# Altium PCB PCB_MAINCUTTIN.PcbDoc
Units mil, origin at the board's own origin, x right, y up, seen from the top; angles counter-clockwise.
Board outline 6000 x 4000 mil, 2 copper layers (Top Layer, Bottom Layer); 146 components, 183 nets, 547 pads, 0 vias.
Unrouted connection lines stored in the file: 344.
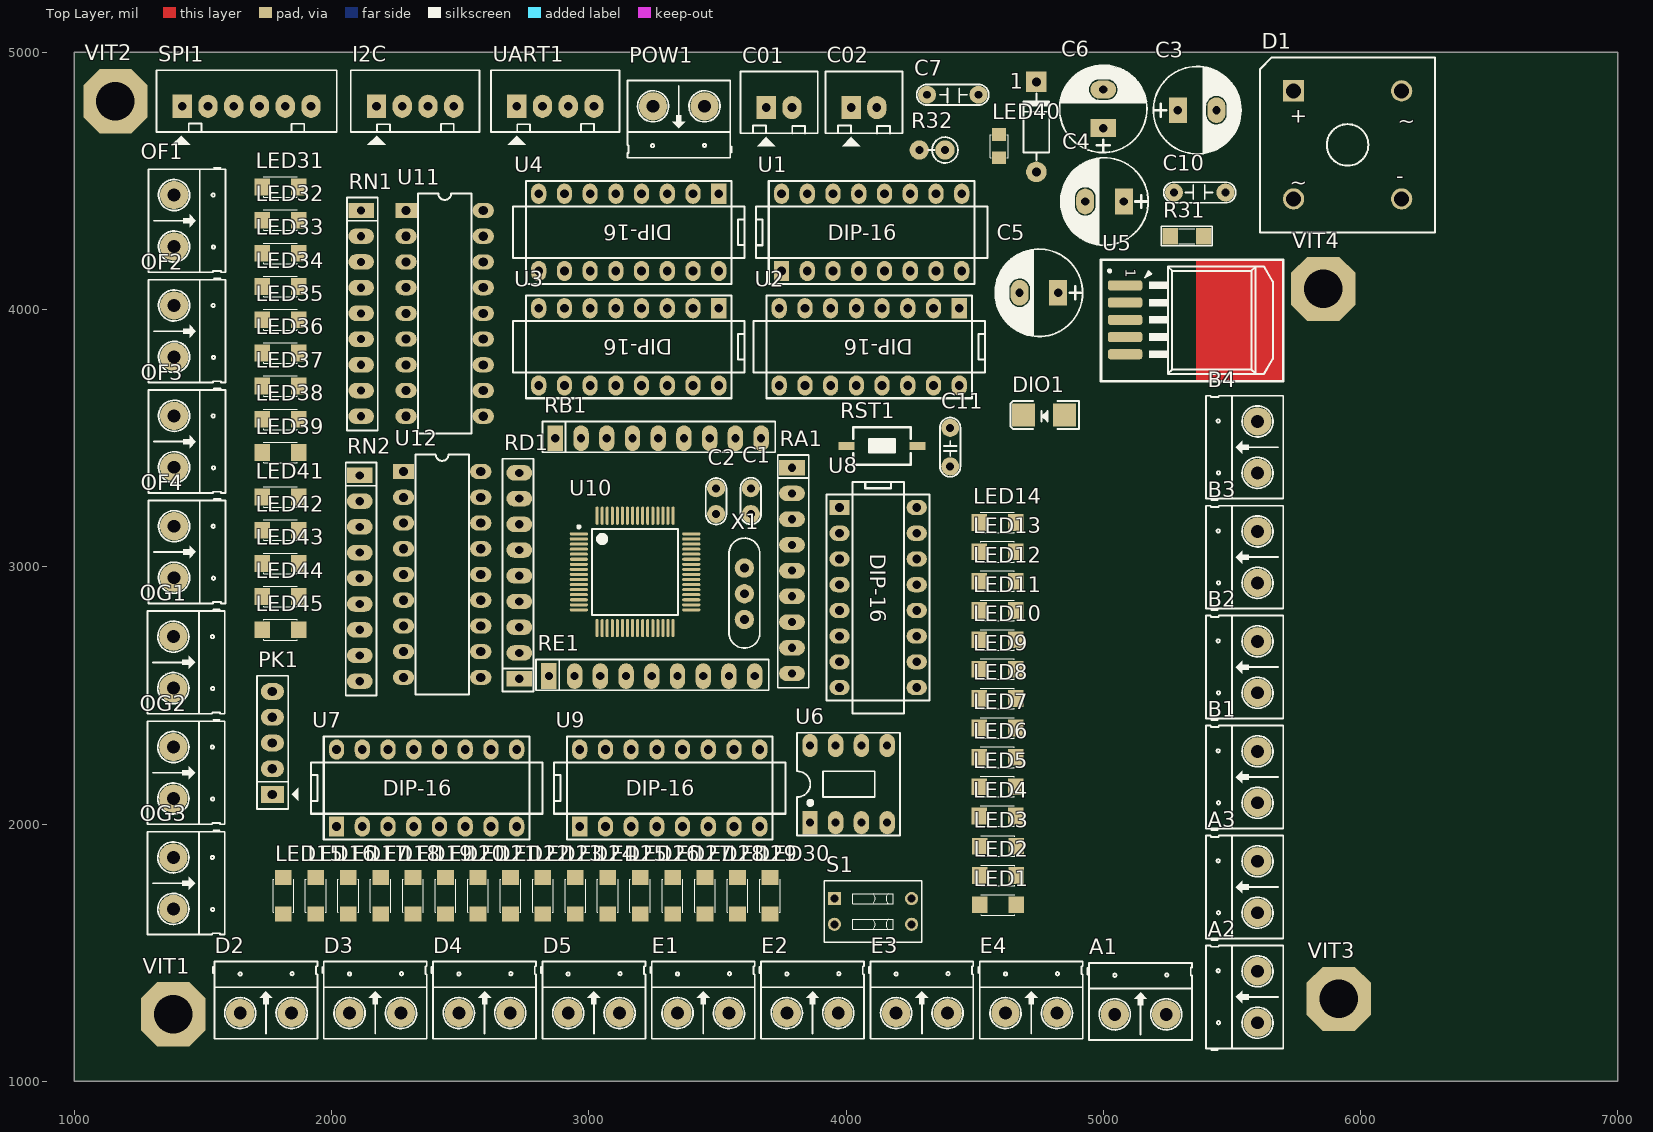
[diagram p0: Top Layer view]
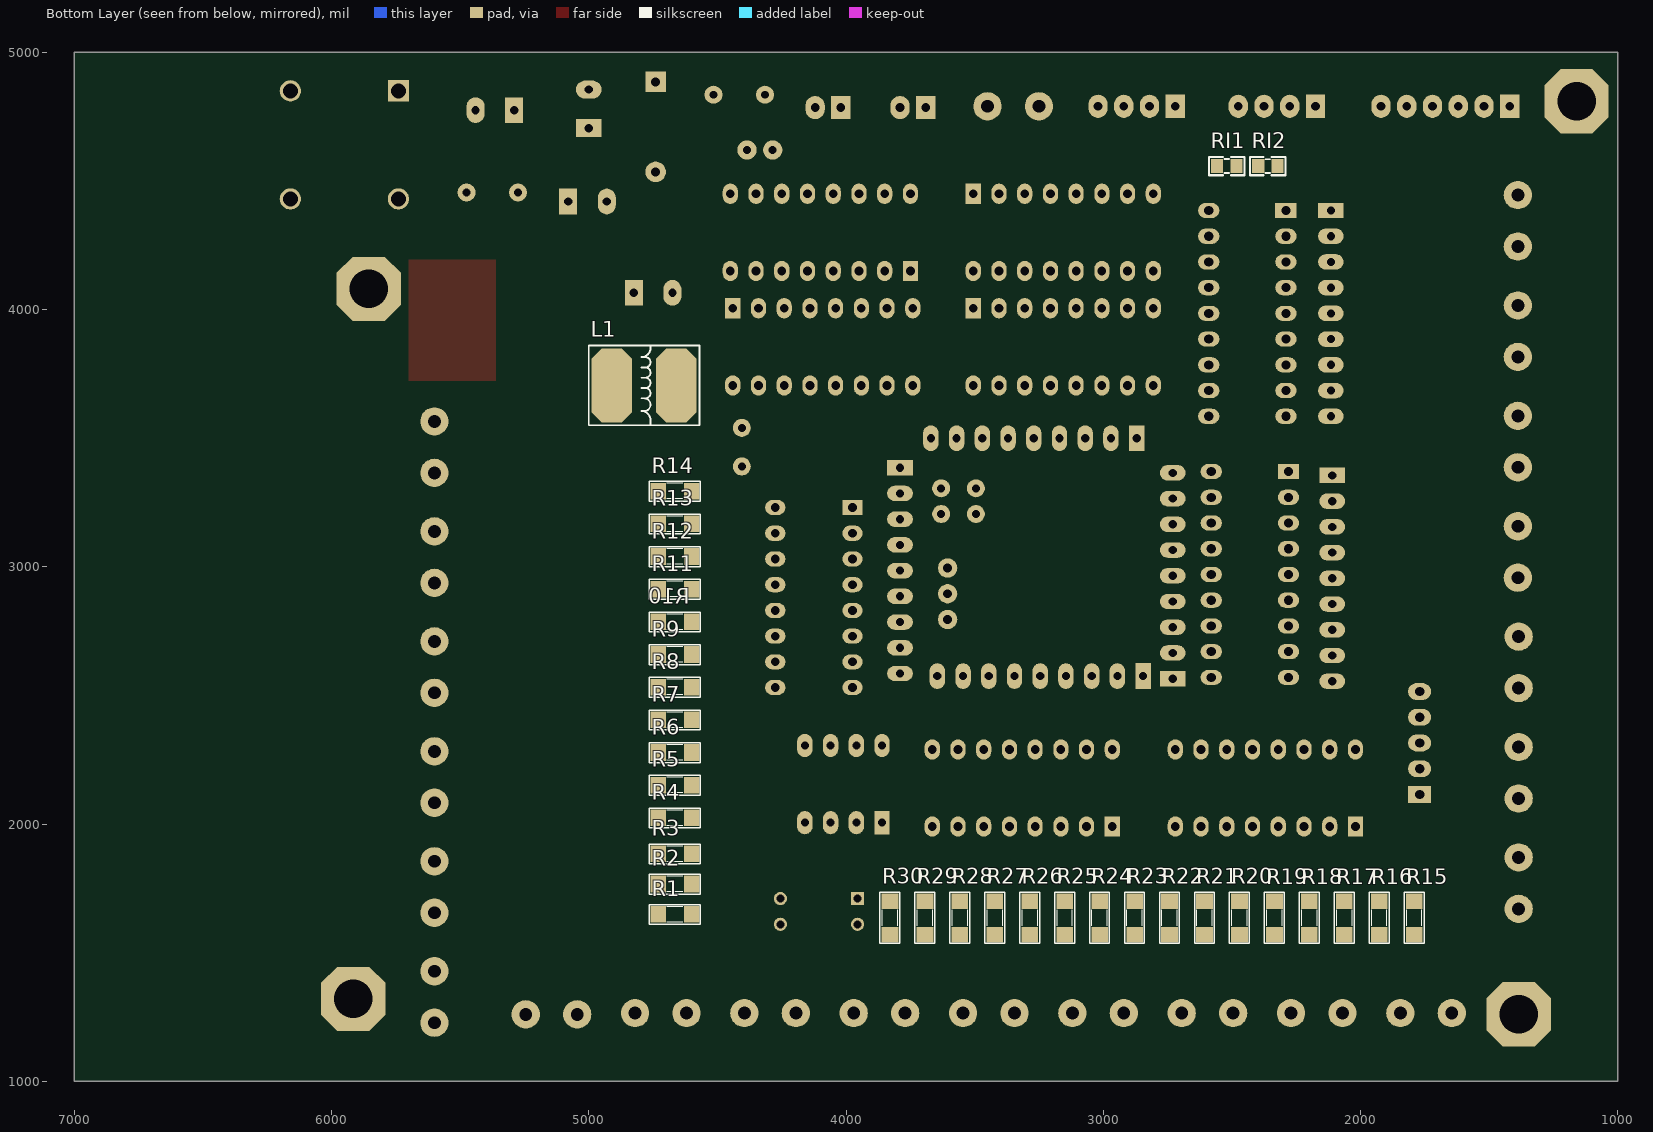
[diagram p1: Bottom Layer view, seen from below]

## Layer stack, top to bottom
Top Solder: solder mask 0.4, Solder Resist, Dk 3.5
Top Layer: signal copper 1.4
Dielectric 1: dielectric 12.6, FR-4, Dk 4.8
Bottom Layer: signal copper 1.4
Bottom Solder: solder mask 0.4, Solder Resist, Dk 3.5

## Board outline
1000,1000 7000,1000 7000,5000 1000,5000

## Design rules (kind name [scope] priority, off if disabled: settings)
Clearance [All] p1: gap=10
PolygonConnect [All] p1: connectstyle=Relief reliefconductorwidth=10 reliefentries=4 polygonreliefangle="90 Angle" airgapwidth=10
RoomDefinition MAINCUTTING [InComponentClass('MAINCUTTING')] p1: confinementstyle=ConfineIn formatcopy=TRUE lockcomponents=FALSE outline 7090,1383 54740,1383 54740,3483 7090,3483
RoutingVias [All] p1: holewidth=28 width=50 viastyle="Through Hole" minholewidth=28 minwidth=50 maxholewidth=28 maxwidth=50
SolderMaskExpansion [All] p1: expansion=4
Width [All] p1: maxlimit=10 minlimit=10 preferedwidth=10
30 further rules are at their usual default settings.

## Components (designator, comment, footprint, x,y, rotation, side; value= is the part's Value field where it differs from the comment)
1 "D0" D1A 4740,4535 r270 top
A1 "Header 2_1" HED2 5045,1260 r0 top
A2 "Header 2_1" HED2 5600,1227.5 r90 top
A3 "Header 2_1" HED2 5600,1655 r90 top
B1 "Header 2_1" HED2 5600,2082.5 r90 top
B2 "Header 2_1" HED2 5600,2510 r90 top
B3 "Header 2_1" HED2 5600,2937.5 r90 top
B4 "Header 2_1" HED2 5600,3365 r90 top
C01 "JP1" CON2 3690,4785 r0 top
C1 "22pF" CN1 3630,3205 r90 top
C02 "JP2" CON2 4020,4785 r0 top
C2 "22pF" CN1 3495,3305 r270 top
C3 "100uF/35V" CP1.5/3.4 5290,4775 r0 top
C4 "1000uF/16V" CP1.5/3.4 5080,4420 r180 top
C5 "100uF/16V" CP1.5/3.4 4825,4065 r180 top
C6 "100nF/16V" CP1.5/3.4 5000,4705 r90 top
C7 "104" CN2 4515,4835 r180 top
C10 "104" CN2 5275,4455 r0 top
C11 "103" CN1.5 4405,3390 r90 top
D1 "Bridge2" D-46_6A 5950,4640 r0 top
D2 "Header 2_1" HED2 1645,1265 r0 top
D3 "Header 2_1" HED2 2070,1265 r0 top
D4 "Header 2_1" HED2 2495,1265 r0 top
D5 "Header 2_1" HED2 2920,1265 r0 top
DIO1 "Diode SMD" DIO-SMD-106 4770,3590 r0 top
E1 "Header 2_1" HED2 3345,1265 r0 top
E2 "Header 2_1" HED2 3770,1265 r0 top
E3 "Header 2_1" HED2 4195,1265 r0 top
E4 "Header 2_1" HED2 4620,1265 r0 top
I2C "JP4" CON4 2175,4790 r0 top
L1 "100uH - 3A SMD" "Cuon Cam 7.5x7x5" 4635,3705 r90 bottom
LED1 "LED SMD" SM-LED-1206-Blue 4662,1685.59 r180 top
LED2 "LED SMD" SM-LED-1206-Blue 4662,1799.71 r180 top
LED3 "LED SMD" SM-LED-1206-Blue 4662,1913.82 r180 top
LED4 "LED SMD" SM-LED-1206-Blue 4660,2031.18 r180 top
LED5 "LED SMD" SM-LED-1206-Blue 4660,2145.29 r180 top
LED6 "LED SMD" SM-LED-1206-Blue 4660,2259.41 r180 top
LED7 "LED SMD" SM-LED-1206-Blue 4660,2373.53 r180 top
LED8 "LED SMD" SM-LED-1206-Blue 4660,2487.65 r180 top
LED9 "LED SMD" SM-LED-1206-Blue 4660,2601.76 r180 top
LED10 "LED SMD" SM-LED-1206-Blue 4660,2715.88 r180 top
LED11 "LED SMD" SM-LED-1206-Blue 4660,2830 r180 top
LED12 "LED SMD" SM-LED-1206-Blue 4660,2944.12 r180 top
LED13 "LED SMD" SM-LED-1206-Blue 4660,3058.24 r180 top
LED14 "LED SMD" SM-LED-1206-Blue 4660,3172.35 r180 top
LED15 "LED SMD" SM-LED-1206-Blue 1812.65,1650 r90 top
LED16 "LED SMD" SM-LED-1206-Blue 1938.76,1650 r90 top
LED17 "LED SMD" SM-LED-1206-Blue 2064.88,1650 r90 top
LED18 "LED SMD" SM-LED-1206-Blue 2191,1650 r90 top
LED19 "LED SMD" SM-LED-1206-Blue 2317.12,1650 r90 top
LED20 "LED SMD" SM-LED-1206-Blue 2443.24,1650 r90 top
LED21 "LED SMD" SM-LED-1206-Blue 2569.36,1650 r90 top
LED22 "LED SMD" SM-LED-1206-Blue 2695.48,1650 r90 top
LED23 "LED SMD" SM-LED-1206-Blue 2821.59,1650 r90 top
LED24 "LED SMD" SM-LED-1206-Blue 2947.71,1650 r90 top
LED25 "LED SMD" SM-LED-1206-Blue 3073.83,1650 r90 top
LED26 "LED SMD" SM-LED-1206-Blue 3199.95,1650 r90 top
LED27 "LED SMD" SM-LED-1206-Blue 3326.07,1650 r90 top
LED28 "LED SMD" SM-LED-1206-Blue 3452.19,1650 r90 top
LED29 "LED SMD" SM-LED-1206-Blue 3578.3,1650 r90 top
LED30 "LED SMD" SM-LED-1206-Blue 3704.42,1650 r90 top
LED31 "LED SMD" SM-LED-1206-Blue 1730,4476.54 r0 top
LED32 "LED SMD" SM-LED-1206-Blue 1730,4347.5 r0 top
LED33 "LED SMD" SM-LED-1206-Blue 1730,4218.46 r0 top
LED34 "LED SMD" SM-LED-1206-Blue 1730,4089.42 r0 top
LED35 "LED SMD" SM-LED-1206-Blue 1730,3960.39 r0 top
LED36 "LED SMD" SM-LED-1206-Blue 1730,3831.35 r0 top
LED37 "LED SMD" SM-LED-1206-Blue 1730,3702.31 r0 top
LED38 "LED SMD" SM-LED-1206-Blue 1730,3573.27 r0 top
LED39 "LED SMD" SM-LED-1206-Blue 1730,3444.23 r0 top
LED40 "LED SMD" SM-LED-0805-Blue 4595,4590 r90 top
LED41 "LED SMD" SM-LED-1206-Blue 1730,3271.16 r0 top
LED42 "LED SMD" SM-LED-1206-Blue 1730,3142.12 r0 top
LED43 "LED SMD" SM-LED-1206-Blue 1730,3013.08 r0 top
LED44 "LED SMD" SM-LED-1206-Blue 1730,2884.04 r0 top
LED45 "LED SMD" SM-LED-1206-Blue 1730,2755 r0 top
OF1 "Header 2_1" HED2 1388,4445 r270 top
OF2 "Header 2_1" HED2 1388,4015.83 r270 top
OF3 "Header 2_1" HED2 1388,3586.67 r270 top
OF4 "Header 2_1" HED2 1388,3157.5 r270 top
OG1 "Header 2_1" HED2 1385,2728.33 r270 top
OG2 "Header 2_1" HED2 1385,2299.17 r270 top
OG3 "Header 2_1" HED2 1385,1870 r270 top
PK1 "JP5" JP5 1770,2115 r90 top
POW1 "Header 2_1" HED2 3450,4790 r180 top
R1 "3K3" SM-RES-1206 4600,1648.82 r0 bottom
R2 "3K3" SM-RES-1206 4600,1766.32 r0 bottom
R3 "3K3" SM-RES-1206 4600,1883.82 r0 bottom
R4 "3K3" SM-RES-1206 4600,2023.82 r0 bottom
R5 "3K3" SM-RES-1206 4600,2150.82 r0 bottom
R6 "3K3" SM-RES-1206 4600,2277.82 r0 bottom
R7 "3K3" SM-RES-1206 4600,2404.82 r0 bottom
R8 "3K3" SM-RES-1206 4600,2531.82 r0 bottom
R9 "3K3" SM-RES-1206 4600,2658.82 r0 bottom
R10 "3K3" SM-RES-1206 4600,2785.82 r0 bottom
R11 "3K3" SM-RES-1206 4600,2912.82 r0 bottom
R12 "3K3" SM-RES-1206 4600,3039.82 r0 bottom
R13 "3K3" SM-RES-1206 4600,3166.82 r0 bottom
R14 "3K3" SM-RES-1206 4600,3293.82 r0 bottom
R15 "3K3" SM-RES-1206 1791,1570 r90 bottom
R16 "3K3" SM-RES-1206 1926.87,1570 r90 bottom
R17 "3K3" SM-RES-1206 2062.73,1570 r90 bottom
R18 "3K3" SM-RES-1206 2198.6,1570 r90 bottom
R19 "3K3" SM-RES-1206 2334.47,1570 r90 bottom
R20 "3K3" SM-RES-1206 2470.33,1570 r90 bottom
R21 "3K3" SM-RES-1206 2606.2,1570 r90 bottom
R22 "3K3" SM-RES-1206 2742.06,1570 r90 bottom
R23 "3K3" SM-RES-1206 2877.93,1570 r90 bottom
R24 "3K3" SM-RES-1206 3013.8,1570 r90 bottom
R25 "3K3" SM-RES-1206 3149.66,1570 r90 bottom
R26 "3K3" SM-RES-1206 3285.53,1570 r90 bottom
R27 "3K3" SM-RES-1206 3421.4,1570 r90 bottom
R28 "3K3" SM-RES-1206 3557.26,1570 r90 bottom
R29 "3K3" SM-RES-1206 3693.13,1570 r90 bottom
R30 "3K3" SM-RES-1206 3829,1570 r90 bottom
R31 "330" SM-RES-1206 5260,4285 r0 top
R32 "Res1" R1/4W1 4385,4620 r180 top
RA1 "10K" RN8 3790,3385 r270 top
RB1 "10K" RN8 2870,3500 r0 top
RD1 "10K" RN8 2730,2565 r90 top
RE1 "10K" RN8 2845,2575 r0 top
RI1 "10k" "tro smd 0805" 2520,4560 r180 bottom
RI2 "10k" "tro smd 0805" 2360,4555 r0 bottom
RN1 "4.7K" RN8 2115,4385 r270 top
RN2 "4.7K" RN8 2110,3355 r270 top
RST1 "MH001036" SW-SMD 4140,3470 r0 top
S1 "partNo" SW-DIP2 4105,1660 r270 top
SPI1 "JP6" CON6 1420,4790 r0 top
U1 "TLP521-4" DIP16 4100,4300 r0 top
U2 "TLP521-4" DIP16 4090,3855 r180 top
U3 "TLP521-4" DIP16 3155,3855 r180 top
U4 "TLP521-4" DIP16 3155,4300 r180 top
U5 "LM2576" TO263 5320,3975 r270 top
U6 "TLP521" DIP8 4005,2155 r0 top
U7 "TLP521-4" DIP16 2370,2140 r0 top
U8 "TLP521-4" DIP16 4125,2880 r270 top
U9 "TLP521-4" DIP16 3315,2140 r0 top
U10 "PIC18F6520-I/PT" TQFP-PT64_N 3180,2980 r0 top
U11 "ULN2803A" DIP18 2440,3985 r270 top
U12 "ULN2803A" DIP18 2430,2970 r270 top
UART1 "JP4" CON4 2720,4790 r0 top
VIT1 "1" VIT 1385,1260 r0 top
VIT2 "1" VIT 1160,4810 r0 top
VIT3 "1" VIT 5915,1320 r0 top
VIT4 "1" VIT 5855,4080 r0 top
X1 "20Mhz" XT3 3605,2895 r270 top

## Footprints (in the part's own frame and the unit in brackets; to place one, negate y for a bottom-side part, rotate by r counter-clockwise, add the part's x,y. Pads: shape width x height; smd on the part's side, far side on the other; paste and mask are expansions set on the pad)
CN1 [mil]
  round 70 hole 31: 1(0,0) 2(100,0)
  silkscreen extent -40,-40 141,40, body extent -60,-30 170,37, height 265
CN1.5 [mil]
  round 70 hole 31: 1(0,0) 2(150,0)
  silkscreen extent -40,-40 190,40, body extent -40,-33 190,33, height 235
CN2 [mil]
  round 70 hole 31: 1(0,0) 2(200,0)
  silkscreen extent -40,-40 240,40, body extent -54,-44 260,55, height 407
CON2 [mil] "CON2"
  rect 75x90 hole 34: 1(0,0)
  oval 75x90 hole 34: 2(100,0)
  silkscreen extent -100,-150 200,140, body extent -68,-70 168,107, height 236
CON4 [mil] "CON4"
  rect 75x90 hole 34: 1(0,0)
  oval 75x90 hole 34: 2(100,0) 3(200,0) 4(300,0)
  silkscreen extent -100,-150 400,140, body extent -90,-90 398,136, height 276
CON6 [mil] "CON6"
  rect 75x90 hole 34: 1(0,0)
  oval 75x90 hole 34: 2(100,0) 3(200,0) 4(300,0) 5(400,0) 6(500,0)
  silkscreen extent -100,-150 600,140
CP1.5/3.4 [mil] "Tu hoa 220->470uF,16V, 470uF/16V,25V"
  rect 70x100 hole 32: 1(0,0)
  oval 70x100 hole 32: 2(150,0)
  silkscreen extent -95,-170 245,170, body extent -85,-157 230,157, height 446
"Cuon Cam 7.5x7x5" [mm]
  oct 7.3x4 smd: 1(0,0.635) 2(0,6.985)
  silkscreen extent -3.94,-1.65 3.94,9.27, body extent -3.5,0.07 3.5,7.8, height 5.02
D1A [mil] "Diode 1A, W 100mil, L 350mil"
  round 80 hole 35: 1(0,0)
  rect 80x80 hole 35: 2(-350,0)
  silkscreen extent -305,-50 -45,50, body extent -386,-33 34,36, height 84
D-46_6A [mm] "Bridge Rectifier; 4 Terminals; Body 16.8 x 16.8 mm (typ); Pitch 10.67 mm"
  rect 2.1x2.1 hole 1.5: 1(-5.335,5.335)
  round 2.1 hole 1.5: 2(-5.335,-5.335) 3(5.335,-5.335) 4(5.335,5.335)
  silkscreen extent -8.65,-8.65 8.65,8.65, body extent -8.65,-8.65 8.65,8.65, height 6.35
DIO-SMD-106 [mil]
  rect 90x90.55 smd: 1(80,0) 2(-80,0)
  silkscreen extent -130,-55 135,55, body extent -99,-50 106,52, height 95
DIP8 [mil] "DIP, 8-Leads, Row Spacing 7.62mm, Pitch 2.54mm, Body 9.91x6.73mm"
  rect 60x90 hole 31: 1(-145,-150)
  oval 60x90 hole 31: 2(-45,-150) 3(55,-150) 4(155,-150) 5(155,150) 6(55,150) 7(-45,150) 8(-145,150)
  silkscreen extent -195,-200 205,200, body extent -213,-153 213,153, height 177
DIP16 [mm]
  rect 1.5x2 hole 0.864: 1(-8.897,-3.812)
  oval 1.5x2 hole 0.864: 2(-6.357,-3.812) 3(-3.817,-3.812) 4(-1.277,-3.812) 5(1.263,-3.812) 6(3.803,-3.812) 7(6.343,-3.812) 8(8.883,-3.812) 9(8.883,3.808) 10(6.343,3.808) 11(3.803,3.808) 12(1.263,3.808) 13(-1.277,3.808) 14(-3.817,3.808) 15(-6.357,3.808) 16(-8.897,3.808)
  silkscreen extent -11.44,-5.08 11.42,5.08, body extent -10,-3.93 10,3.94, height 1.99
DIP18 [mm] "DIP; 18 Leads; Row Spacing 7.62 mm; Pitch 2.54 mm"
  rect 1.5x2.1 hole 0.9: 1(-10.16,-3.81)
  oval 1.5x2.1 hole 0.9: 2(-7.62,-3.81) 3(-5.08,-3.81) 4(-2.54,-3.81) 5(0,-3.81) 6(2.54,-3.81) 7(5.08,-3.81) 8(7.62,-3.81) 9(10.16,-3.81) 10(10.16,3.81) 11(7.62,3.81) 12(5.08,3.81) 13(2.54,3.81) 14(0,3.81) 15(-2.54,3.81) 16(-5.08,3.81) 17(-7.62,3.81) 18(-10.16,3.81)
  silkscreen extent -11.85,-2.65 11.85,2.65, body extent -11.49,-4.06 11.5,3.81, height 5.08
HED2 [mil] "Header 2, 2 pin, hight 300mil, Pin to Pin 200, Colour Green"
  round 110 hole 50: 1(0,0) 2(200,0)
  silkscreen extent -106,-100 300,200, body extent -92,-140 302,155, height 394
JP5 [mil] "JP5"
  rect 65x90 hole 36: 1(0,0)
  oval 65x90 hole 36: 2(100,0) 3(200,0) 4(300,0) 5(400,0)
  silkscreen extent -57,-101 461,60, body extent -48,-53 448,45, height 323
R1/4W1 [mm] "R 1/4W, 2 Pin, 150mil"
  round 1.905 hole 0.8: 1(0,0) 2(2.54,0)
  silkscreen extent -1.28,-1.28 1.65,1.28, body extent -0.89,-0.92 2.82,0.92, height 7.3
RN8 [mil] "R SIP8, 9 Pin"
  rect 60x100 hole 32: 1(0,0)
  oval 60x100 hole 32: 2(100,0) 3(200,0) 4(300,0) 5(400,0) 6(500,0) 7(600,0) 8(700,0) 9(800,0)
  silkscreen extent -50,-55 855,65, body extent -43,-20 843,29, height 219
SM-LED-0805-Blue [mil]
  rect 50x55 smd: 1(0,0) 2(90,0)
  silkscreen extent 0,-35 90,35, body extent 5,-25 85,25, height 43
SM-LED-1206-Blue [mil] "Compoment SMD 120x60mil"
  rect 60x65 smd: 1(0,0) 2(142,0)
  silkscreen extent 6,-40 136,40, body extent 7,-31 133,32, height 43
SM-RES-1206 [mil]
  rect 60x65 smd: 1(0,0) 2(130,0)
  silkscreen extent -34,-38 164,39, body extent 2,-31 128,31, height 40
SW-DIP2 [mm] "02p, 2.54mm Pitch, Horizontal, Box Type, THT, flat Actuator, red, without Tape, Tube"
  rect 1.3x1.3 hole 0.8: 1(-1.27,-3.81)
  round 1.3 hole 0.8: 2(1.27,-3.81) 3(1.27,3.81) 4(-1.27,3.81)
  silkscreen extent -3.04,-4.8 3.04,4.8, body extent -3.04,-4.7 3.04,4.9, height 5.4
SW-SMD [mm] "Switch SMD type"
  rect 1.6x0.8 smd: 1(-3.5,0) 2(3.5,0)
  silkscreen extent -2.82,-1.85 2.82,1.85, body extent -3.05,-1.85 3.05,1.85, height 2.5
TO263 [mm]
  rrect50% 1x3.4 smd: 1(-3.019,-5.969) 2(-1.319,-5.969) 4(2.081,-5.969) 5(3.781,-5.969)
  rrect50% 1x3.4 smd mask+0: 3(0.381,-5.969)
  Top Layer region: -5.568,1.016 6.432,1.016 6.432,9.65 -5.568,9.65
  silkscreen extent -5.57,-8.35 6.43,9.65, body extent -4.73,-6.84 5.43,7.8, height 4.57
TQFP-PT64_N [mm] "Thin QFP, 64-Leads, Body 10x10mm, Pitch 0.5mm, IPC Medium Density"
  oval 1.8x0.3 smd: 1(-5.55,3.75) 2(-5.55,3.25) 3(-5.55,2.75) 4(-5.55,2.25) 5(-5.55,1.75) 6(-5.55,1.25) 7(-5.55,0.75) 8(-5.55,0.25) 9(-5.55,-0.25) 10(-5.55,-0.75) 11(-5.55,-1.25) 12(-5.55,-1.75) 13(-5.55,-2.25) 14(-5.55,-2.75) 15(-5.55,-3.25) 16(-5.55,-3.75) 33(5.55,-3.75) 34(5.55,-3.25) 35(5.55,-2.75) 36(5.55,-2.25) 37(5.55,-1.75) 38(5.55,-1.25) 39(5.55,-0.75) 40(5.55,-0.25) 41(5.55,0.25) 42(5.55,0.75) 43(5.55,1.25) 44(5.55,1.75) 45(5.55,2.25) 46(5.55,2.75) 47(5.55,3.25) 48(5.55,3.75)
  oval 0.3x1.8 smd: 17(-3.75,-5.55) 18(-3.25,-5.55) 19(-2.75,-5.55) 20(-2.25,-5.55) 21(-1.75,-5.55) 22(-1.25,-5.55) 23(-0.75,-5.55) 24(-0.25,-5.55) 25(0.25,-5.55) 26(0.75,-5.55) 27(1.25,-5.55) 28(1.75,-5.55) 29(2.25,-5.55) 30(2.75,-5.55) 31(3.25,-5.55) 32(3.75,-5.55) 49(3.75,5.55) 50(3.25,5.55) 51(2.75,5.55) 52(2.25,5.55) 53(1.75,5.55) 54(1.25,5.55) 55(0.75,5.55) 56(0.25,5.55) 57(-0.25,5.55) 58(-0.75,5.55) 59(-1.25,5.55) 60(-1.75,5.55) 61(-2.25,5.55) 62(-2.75,5.55) 63(-3.25,5.55) 64(-3.75,5.55)
  silkscreen extent -5.67,-4.25 4.25,4.57, body extent -5,-5 5,5, height 1.2
"tro smd 0805" [mm]
  rect 1.2x1.4 smd: 1(-0.946,-0.061) 2(0.954,-0.061)
  silkscreen extent -1.75,-0.97 1.75,0.84, body extent -1.56,-0.76 1.44,0.64, height 0.53
VIT [mil] "VIT"
  oct 250x250 hole 150: VIT1(0,0)
XT3 [mil]
  round 75 hole 34: 1(-100,0) 2(100,0) 3(0,0)
  silkscreen extent -216,-60 211,60, body extent -212,-60 208,60, height 127

## Part data
1: library part Zener
A1 A2 A3 B1 B2 B3 B4 D2 D3 D4 D5 E1 E2 E3 E4 OF1 OF2 OF3 OF4 OG1 OG2 OG3 POW1: "Header, 2-Pin"
C01 C02: library part Con2, "Connector 2"
C1 C2: library part CN1, "Cap np  1pF - 472pF"
C3: library part CP3, "Cap 100uF/35V - 470uF/16V"
C4 C5 C6: library part CP4, "Cap 1000uF/16V - 220uF/50V"
C7 C10: library part CN2, "Cap np 104 => 105pF"
C11: library part CN1.5, "Cap np 682pF => 104pF"
D1: "Diode Bridge"
DIO1: "Default Diode"
I2C UART1: library part Con4, "Connector 4"
L1: library part "CUON CAM 100uH_SMD", "Dán"
LED1 LED2 LED3 LED4 LED5 LED6 LED7 LED8 LED9 LED10 LED11 LED12 LED13 LED14 LED15 LED16 LED17 LED18 LED19 LED20 LED21 LED22 LED23 LED24 LED25 LED26 LED27 LED28 LED29 LED30 LED31 LED32 LED33 LED34 LED35 LED36 LED37 LED38 LED39 LED41 LED42 LED43 LED44 LED45: library part LED-SMD-1206
LED40: library part LED-SMD-0805
R1 R2 R3 R4 R5 R6 R7 R8 R9 R10 R11 R12 R13 R14 R15 R16 R17 R18 R19 R20 R21 R22 R23 R24 R25 R26 R27 R28 R29 R30 R31: library part R, "Resistor 1/4W"
R32: library part Res1_5, "Resistor"
RA1 RB1 RD1 RE1 RN1 RN2: library part RN8, "Resistor 8 (Thanh)"
RI1 RI2: library part "Tro 0805 1% 10k", "Dán"
RST1: library part SW-SMD, "Dán"
S1: library part SWDIP2, "WS-DITV 2.54 mm small compact THT flat actuator with top tape"
SPI1: library part Con6, "Connector 6"
U1 U2 U3 U4 U7 U8 U9: "Four Opto"
U6: library part TLP521-2, "Dual Opto"
U10: "High Performance, 32K Enhanced Flash Microcontroller with A/D, 64-Pin TQFP, Industrial Temperature"
U11 U12: "High-Voltage, High-Current Darlington Array"
VIT1 VIT2 VIT3 VIT4: library part VIT, "Oc Vit"
X1: library part XT3, "Crystal For all Crystal 2pin."

## Nets (pads, with @x,y where several pads share a name; then routed paths per layer and width w, separated by ;. In a path a pad name is that pad's centre, name@x,y a point inside that pad or via, vN(x,y) a via of type N, cw(c..) or ccw(c..) an arc to the next point about the centre after c; other vN are vias at no path point)
+5V: C4.1 C5.1 C6.1 C7.2 C10.2 DIO1.1 I2C.2 L1.2 PK1.2 R31.2 R32.2 RA1.1 RB1.1 RD1.1 RE1.1 RST1.1 SPI1.2 U5.4 UART1.2
+24V: C3.1 D1.1 RN1.1 RN2.1 U1.1 U1.3 U1.5 U1.7 U2.1 U2.3 U2.5 U2.7 U3.1 U3.3 U3.5 U3.7 U4.1 U4.3 U4.5 U4.7 U5.1 U6.1 U6.3 U7.1 U7.3 U7.5 U7.7 U8.3 U8.5 U8.7 U9.3 U9.5 U9.7 U11.10 U12.10
A0: RA1.2 U1.16 U10.24
A1: RA1.3 U1.14 U10.23
A2: RA1.4 U1.12 U10.22
A3: RA1.5 U1.10 U10.21
A4: RA1.6 U2.16 U10.28
A5: RA1.7 U2.14 U10.27
B0: RB1.2 U2.12 U10.48
B1: RB1.3 U2.10 U10.47
B2: RB1.4 U3.16 U10.46
B3: RB1.5 U3.14 U10.45
B4: RB1.6 U3.12 U10.44
B5: RB1.7 U3.10 U10.43
B6: PK1.5 S1.4 U10.42
B7: PK1.4 S1.3 U10.37
C0: C01.1 SPI1.6 U10.30
C1: C01.2 U10.29
C2: C02.1 U10.33
C3: I2C.4 RI1.1 SPI1.3 U10.34
C4: I2C.3 RI2.1 SPI1.4 U10.35
C5: SPI1.5 U10.36
C6: U10.31 UART1.4
C7: U10.32 UART1.3
D0: RD1.2 U4.12 U10.58
D1: RD1.3 U4.10 U10.55
D2: RD1.4 U7.16 U10.54
D3: RD1.5 U7.14 U10.53
D4: RD1.6 U7.12 U10.52
D5: RD1.7 U7.10 U10.51
D6: RD1.8 U8.16 U10.50
D7: RD1.9 U8.14 U10.49
E0: RE1.2 U8.12 U10.2
E1: RE1.3 U8.10 U10.1
E2: RE1.4 U9.16 U10.64
E3: RE1.5 U9.14 U10.63
E4: RE1.6 U9.12 U10.62
E5: RE1.7 U9.10 U10.61
E6: RE1.8 U6.6 U10.60
E7: RE1.9 U6.8 U10.59
F0: U10.18 U11.1
F1: U10.17 U11.2
F2: U10.16 U11.3
F3: U10.15 U11.4
F4: U10.14 U11.5
F5: U10.13 U11.6
F6: U10.12 U11.7
F7: U10.11 U11.8
G0: U10.3 U12.1
G1: U10.4 U12.2
G2: U10.5 U12.3
G3: U10.6 U12.4
G4: U10.8 U12.5
GND: C1.1 C2.1 C3.2 C7.1 C10.1 C11.2 I2C.1 LED40.2 PK1.3 SPI1.1 U1.9 U1.11 U1.13 U1.15 U2.9 U2.11 U2.13 U2.15 U3.9 U3.11 U3.13 U3.15 U4.9 U4.11 U4.13 U4.15 U6.5 U6.7 U7.9 U7.11 U7.13 U7.15 U8.9 U8.11 U8.13 U8.15 U9.9 U9.11 U9.13 U9.15 U10.9 U10.20 U10.25 U10.41 U10.56 U11.9 U12.9 UART1.1
IA0: A1.1 R1.1
IA1: A1.2 R2.1
IA2: A2.1 R3.1
IA3: A2.2 R4.1
IA4: A3.1 R5.1
IA5: A3.2 R6.1
IB0: B1.1 R7.1
IB1: B1.2 R8.1
IB2: B2.1 R9.1
IB3: B2.2 R10.1
IB4: B3.1 R11.1
IB5: B3.2 R12.1
IB6: B4.1 R13.1
IB7: B4.2 R14.1
ID0: D2.1 R15.1
ID1: D2.2 R16.1
ID2: D3.1 R17.1
ID3: D3.2 R18.1
ID4: D4.1 R19.1
ID5: D4.2 R20.1
ID6: D5.1 R21.1
ID7: D5.2 R22.1
IE0: E1.1 R23.1
IE1: E1.2 R24.1
IE2: E2.1 R25.1
IE3: E2.2 R26.1
IE4: E3.1 R27.1
IE5: E3.2 R28.1
IE6: E4.1 R29.1
IE7: E4.2 R30.1
IN_B6: RB1.8 S1.1 U4.16
IN_B7: RB1.9 S1.2 U4.14
Net1_1: 1.1 C4.2 C5.2 C6.2 D1.3 LED31.2 U5.3 U5.5
Net1_2: 1.2 L1.1 U5.2
NetDIO1_2: DIO1.2 U10.10 U10.19 U10.26 U10.38 U10.57
NetLED1_1: LED1.1 U1.2
NetLED1_2: LED1.2 R1.2
NetLED2_1: LED2.1 U1.4
NetLED2_2: LED2.2 R2.2
NetLED3_1: LED3.1 U1.6
NetLED3_2: LED3.2 R3.2
NetLED4_1: LED4.1 U1.8
NetLED4_2: LED4.2 R4.2
NetLED5_1: LED5.1 U2.2
NetLED5_2: LED5.2 R5.2
NetLED6_1: LED6.1 U2.4
NetLED6_2: LED6.2 R6.2
NetLED7_1: LED7.1 U2.6
NetLED7_2: LED7.2 R7.2
NetLED8_1: LED8.1 U2.8
NetLED8_2: LED8.2 R8.2
NetLED9_1: LED9.1 U3.2
NetLED9_2: LED9.2 R9.2
NetLED10_1: LED10.1 U3.4
NetLED10_2: LED10.2 R10.2
NetLED11_1: LED11.1 U3.6
NetLED11_2: LED11.2 R11.2
NetLED12_1: LED12.1 U3.8
NetLED12_2: LED12.2 R12.2
NetLED13_1: LED13.1 U4.2
NetLED13_2: LED13.2 R13.2
NetLED14_1: LED14.1 U4.4
NetLED14_2: LED14.2 R14.2
NetLED15_1: LED15.1 U4.6
NetLED15_2: LED15.2 R15.2
NetLED16_1: LED16.1 U4.8
NetLED16_2: LED16.2 R16.2
NetLED17_1: LED17.1 U7.2
NetLED17_2: LED17.2 R17.2
NetLED18_1: LED18.1 U7.4
NetLED18_2: LED18.2 R18.2
NetLED19_1: LED19.1 U7.6
NetLED19_2: LED19.2 R19.2
NetLED20_1: LED20.1 U7.8
NetLED20_2: LED20.2 R20.2
NetLED21_1: LED21.1 U8.2
NetLED21_2: LED21.2 R21.2
NetLED22_1: LED22.1 U8.4
NetLED22_2: LED22.2 R22.2
NetLED23_1: LED23.1 U8.6
NetLED23_2: LED23.2 R23.2
NetLED24_1: LED24.1 U8.8
NetLED24_2: LED24.2 R24.2
NetLED25_1: LED25.1 U9.2
NetLED25_2: LED25.2 R25.2
NetLED26_1: LED26.1 U9.4
NetLED26_2: LED26.2 R26.2
NetLED27_1: LED27.1 U9.6
NetLED27_2: LED27.2 R27.2
NetLED28_1: LED28.1 U9.8
NetLED28_2: LED28.2 R28.2
NetLED29_1: LED29.1 U6.4
NetLED29_2: LED29.2 R29.2
NetLED30_1: LED30.1 U6.2
NetLED30_2: LED30.2 R30.2
NetLED31_1: LED31.1 R31.1
NetLED32_1: LED32.1 RN1.2
NetLED33_1: LED33.1 RN1.3
NetLED34_1: LED34.1 RN1.4
NetLED35_1: LED35.1 RN1.5
NetLED36_1: LED36.1 RN1.6
NetLED37_1: LED37.1 RN1.7
NetLED38_1: LED38.1 RN1.8
NetLED39_1: LED39.1 RN1.9
NetLED40_1: LED40.1 R32.1
NetLED41_1: LED41.1 RN2.2
NetLED42_1: LED42.1 RN2.3
NetLED43_1: LED43.1 RN2.4
NetLED44_1: LED44.1 RN2.5
NetLED45_1: LED45.1 RN2.6
NetRI1_2: RI1.2 RI2.2
OF0: LED32.2 OF1.1 U11.18
OF1: LED33.2 OF1.2 U11.17
OF2: LED34.2 OF2.1 U11.16
OF3: LED35.2 OF2.2 U11.15
OF4: LED36.2 OF3.1 U11.14
OF5: LED37.2 OF3.2 U11.13
OF6: LED38.2 OF4.1 U11.12
OF7: LED39.2 OF4.2 U11.11
OG0: LED41.2 OG1.1 U12.18
OG1: LED42.2 OG1.2 U12.17
OG2: LED43.2 OG2.1 U12.16
OG3: LED44.2 OG2.2 U12.15
OG4: LED45.2 OG3.1 U12.14
OSC1: C1.2 U10.39 X1.2
OSC2: C2.2 U10.40 X1.1
P+24V: D1.4 POW1.2
PGND: D1.2 POW1.1
RESET: C11.1 PK1.1 RST1.2 U10.7
pads on no net: C02.2 OG3.2 RA1.8 RA1.9 RN2.7 RN2.8 RN2.9 U8.1 U9.1 U12.6 U12.7 U12.8 U12.11 U12.12 U12.13 VIT1.VIT1 VIT2.VIT1 VIT3.VIT1 VIT4.VIT1 X1.3

## Text inside footprints (layer, text, board x,y; h text height)
D1: Top Overlay "+" at 5724.69,4725.31 h59.06; Top Overlay "-" at 6139.96,4490.04 h59.06; Top Overlay "~" at 6144.69,4705.31 h59.06; Top Overlay "~" at 5724.69,4465.31 h59.06
U1: Top Overlay "DIP-16" at 3929.71,4269.92 h59.05
U2: Top Overlay "DIP-16" at 4260.29,3885.08 h59.05 r180
U3: Top Overlay "DIP-16" at 3325.29,3885.08 h59.05 r180
U4: Top Overlay "DIP-16" at 3325.29,4330.08 h59.05 r180
U5: Top Overlay "1" at 5087,4157.86 h39.37 r270
U7: Top Overlay "DIP-16" at 2199.71,2109.92 h59.05
U8: Top Overlay "DIP-16" at 4094.92,3050.29 h59.05 r270
U9: Top Overlay "DIP-16" at 3144.71,2109.92 h59.05